# EAGLE board DMB-4771-Relais (EAGLE 6.5.0)
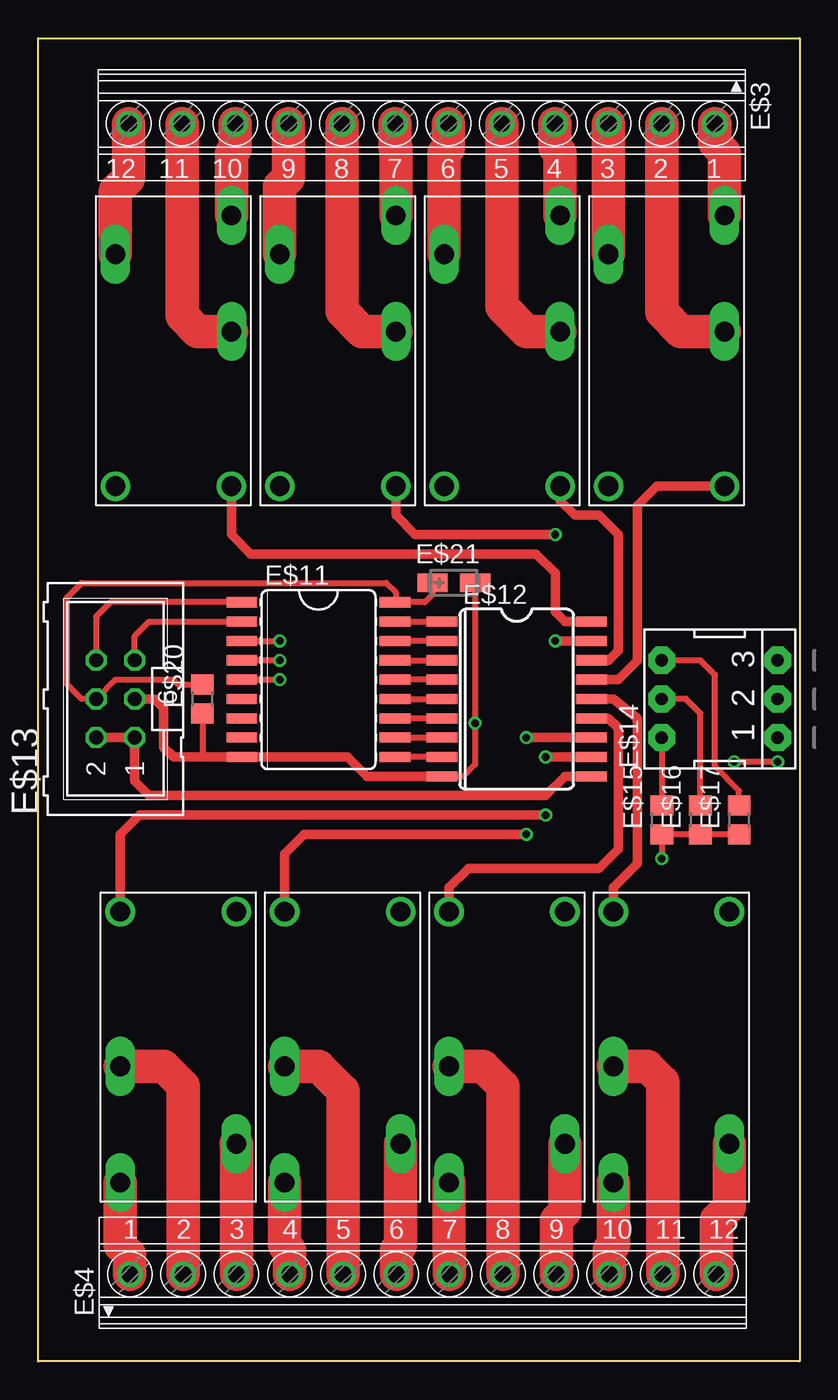
[diagram p0: board, top side]
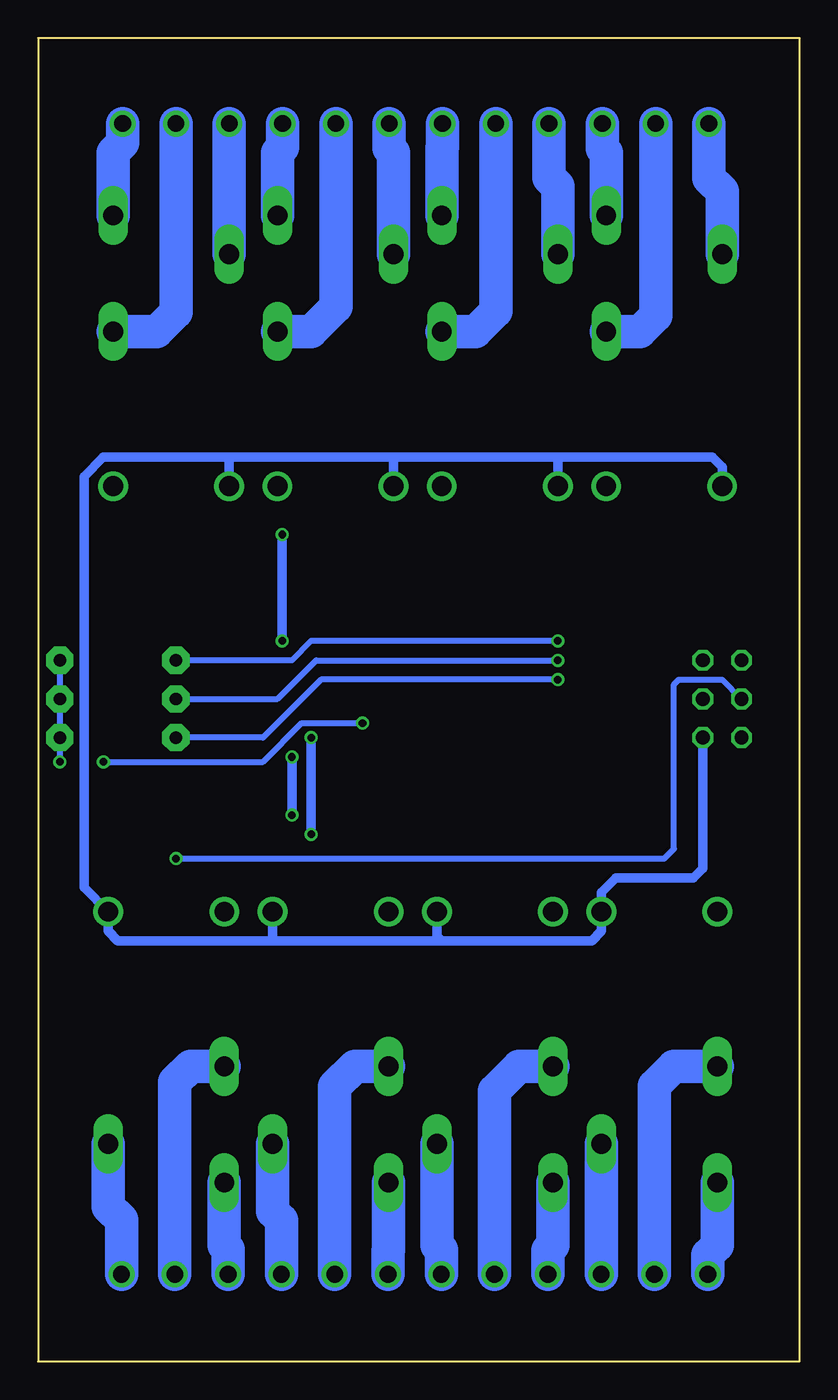
[diagram p1: board, bottom side, seen from below]

Size 50.01 x 86.89 mm. Coordinates in mm from the lower left corner, seen from the top.
Outline: 0,86.89 50.01,86.89 50.01,0 0,0 0,86.89
Copper layers (1*16): Top 0.0356mm / dielectric 1.5011mm / Bottom 0.0356mm
Design rules "LaenPCBOrder": minimum track width 6mil, minimum drill 13mil, track to track 6mil, track to pad 6mil, pad to pad 6mil, via to via 6mil, smd to smd 6mil, copper to edge 15mil, drill to drill 6mil, minimum pad ring 7mil, minimum via ring 7mil, stop-mask expansion 3mil, vias tented up to drill 0mil, thermal gap 10mil

## Footprints (pad centres in the part's own frame; a part is rotated, then mirrored left to right if it is on the bottom)
ALQ = drill 1.3: P$1 0,3.81; P$2 0,-3.81 | drill 1.3 pad 1.676 long: P$3 10.16,-3.81; P$4 17.78,-3.81; P$5 15.24,3.81
175317 = drill 1.1 pad 1.7: 1 -13.973,0; 2 -10.473,0; 3 -6.973,0; 4 -3.473,0; 5 0.028,0; 6 3.527,0; 7 7.027,0; 8 10.527,0; 9 14.027,0; 19 17.527,0; 20 21.027,0; 21 24.527,0
SO18W = smd 0.66 x 2.032: 1 -5.08,-5.029; 2 -3.81,-5.029; 3 -2.54,-5.029; 4 -1.27,-5.029; 5 0,-5.029; 6 1.27,-5.029; 7 2.54,-5.029; 8 3.81,-5.029; 9 5.08,-5.029; 10 5.08,5.029; 11 3.81,5.029; 12 2.54,5.029; 13 1.27,5.029; 14 0,5.029; 15 -1.27,5.029; 16 -2.54,5.029; 17 -3.81,5.029; 18 -5.08,5.029
SO18L = smd 0.66 x 2.032: 1 -0.635,-4.902; 2 0.635,-4.902; 3 1.905,-4.902; 4 3.175,-4.902; 5 4.445,-4.902; 6 5.715,-4.902; 7 6.985,-4.902; 8 8.255,-4.902; 9 9.525,-4.902; 10 9.525,4.902; 11 8.255,4.902; 12 6.985,4.902; 13 5.715,4.902; 14 4.445,4.902; 15 3.175,4.902; 16 1.905,4.902; 17 0.635,4.902; 18 -0.635,4.902
ML6 = drill 0.914 octagon: 1 -2.54,-1.27; 2 -2.54,1.27; 3 0,-1.27; 4 0,1.27; 5 2.54,-1.27; 6 2.54,1.27
EPG-03-SMALL = drill 0.813 pad 1.778 octagon: 1 -2.54,-3.81; 2 0,-3.81; 3 2.54,-3.81; 4 2.54,3.81; 5 0,3.81; 6 -2.54,3.81
R0805 = smd 1.3 x 1.5: 1 -0.95,0; 2 0.95,0
CT3216 = smd 2 x 1.2: + -1.4,0; - 1.4,0

## Placement (x,y rotation side)
E$1  ALQ105  [ALQ]  19.68,57.47 90 top
E$2  ALQ105  [ALQ]  8.89,57.47 90 top
E$3  [175317]  30.48,81.28 180 top
E$4  [175317]  20,5.71 0 top
E$5  ALQ105  [ALQ]  41.27,57.47 90 top
E$6  ALQ105  [ALQ]  30.48,57.47 90 top
E$7  ALQ105  [ALQ]  30.8,29.53 270 top
E$8  ALQ105  [ALQ]  41.59,29.53 270 top
E$9  ALQ105  [ALQ]  9.21,29.53 270 top
E$10  ALQ105  [ALQ]  20,29.53 270 top
E$11  MCP2308  [SO18W]  18.41,44.77 270 top
E$12  ULN2803  [SO18L]  31.43,47.94 270 top
E$13  [ML6]  5.08,43.5 90 top
E$14  [EPG-03-SMALL]  44.77,43.5 90 top
E$15  10K  [R0805]  40.96,35.56 90 top
E$16  10K  [R0805]  43.5,35.56 90 top
E$17  10K  [R0805]  46.04,35.56 90 top
E$20  100n  [R0805]  10.79,43.5 90 top
E$21  10u  [CT3216]  27.3,51.12 0 top

## Library data of the parts
E$1 E$2 E$5-E$10 = relay
E$3 E$4 = con-phoenix-350
E$11 = uln-udn
E$12 = SparkFun-PowerIC
E$13 = con-harting-ml
E$14 = special
E$15-E$17 E$20 E$21 = ref-packages

## Nets
3V3: E$11.18 E$13.4 E$15.1 E$16.1 E$17.1 E$20.2 E$21.+
5V: E$1.P$1 E$2.P$1 E$5.P$1 E$6.P$1 E$7.P$1 E$8.P$1 E$9.P$1 E$10.P$1 E$12.10 E$13.1 E$13.2
GND: E$11.9 E$12.9 E$13.3 E$14.1 E$14.2 E$14.3 E$20.1 E$21.-
S$8: E$2.P$5 E$3.21
S$9: E$2.P$3 E$3.20
S$10: E$2.P$4 E$3.19
S$11: E$1.P$5 E$3.9
S$13: E$1.P$4 E$3.7
S$14: E$1.P$3 E$3.8
S$15: E$3.6 E$6.P$5
S$16: E$3.5 E$6.P$3
S$17: E$3.4 E$6.P$4
S$18: E$3.3 E$5.P$5
S$19: E$3.2 E$5.P$3
S$20: E$3.1 E$5.P$4
S$21: E$4.21 E$8.P$5
S$22: E$4.20 E$8.P$3
S$23: E$4.19 E$8.P$4
S$24: E$4.8 E$7.P$3
S$25: E$4.6 E$10.P$5
S$26: E$4.5 E$10.P$3
S$27: E$4.3 E$9.P$5
S$28: E$4.2 E$9.P$3
S$29: E$4.9 E$7.P$5
S$30: E$4.7 E$7.P$4
S$31: E$4.4 E$10.P$4
S$32: E$4.1 E$9.P$4
S$61: E$11.17 E$12.1
S$62: E$11.16 E$12.2
S$63: E$11.15 E$12.3
S$64: E$11.14 E$12.4
S$65: E$11.13 E$12.5
S$66: E$11.12 E$12.6
S$67: E$11.11 E$12.7
S$68: E$11.10 E$12.8
S$70: E$2.P$2 E$12.18
S$71: E$1.P$2 E$12.17
S$72: E$6.P$2 E$12.16
S$73: E$5.P$2 E$12.15
S$74: E$8.P$2 E$12.14
S$75: E$7.P$2 E$12.13
S$76: E$10.P$2 E$12.12
S$77: E$9.P$2 E$12.11
S$78: E$11.3 E$14.4 E$17.2
S$79: E$11.4 E$14.5 E$16.2
S$80: E$11.5 E$14.6 E$15.2
SCL: E$11.1 E$13.6
SDA: E$11.2 E$13.5

## Tracks (layer width: path | path; a pad name or v marks a point on that pad's centre or on a via)
3V3  (via drill 0.5)
  Top 0.406: E$17.1 E$16.1 E$15.1 v40.96,33.02 | E$21.+ 25.91,50.35 25.4,49.85 E$11.18 23.5,50.02 23.5,50.48 22.86,51.12 2.86,51.12 1.91,50.16 1.91,44.45 2.86,43.5 E$13.4 5.08,44.77 8.89,44.77 9.21,44.45 E$20.2
  Bottom 0.406: v40.96,33.02 8.89,33.02 8.26,33.66 8.26,44.45 7.94,44.77 5.08,44.77 E$13.4
5V
  Top 0.61: E$13.2 E$13.1 6.35,38.1 7.3,37.15 33.34,37.15 34.61,38.42 E$12.10
  Bottom 0.61: 23.5,27.62 13.65,27.62 13.02,28.26 E$9.P$1 13.02,30.8 12.06,31.75 6.99,31.75 6.35,32.38 E$13.1 | 23.5,27.62 34.61,27.62 | 34.61,27.62 44.77,27.62 45.4,28.26 E$8.P$1 46.99,31.11 46.99,58.1 45.72,59.37 37.47,59.37 | E$7.P$1 34.61,27.62 | E$10.P$1 23.81,27.94 23.5,27.62 | E$2.P$1 5.08,58.74 5.71,59.37 15.88,59.37 | 15.88,59.37 26.67,59.37 | 26.67,59.37 37.47,59.37 | E$1.P$1 15.88,59.37 | E$6.P$1 26.67,59.37 | E$5.P$1 37.47,59.37
GND  (via drill 0.5)
  Top 0.406: 12.7,39.69 10.8,39.69 | 10.8,39.69 10.48,39.69 | E$21.- v28.7,41.91 28.7,39.18 27.94,38.42 E$12.9 | v48.58,39.37 v45.72,39.37 | E$20.1 10.79,39.69 10.8,39.69
  Top 0.61: E$13.3 7.62,43.5 8.26,42.86 8.26,40.32 8.89,39.69 10.48,39.69 E$11.9 | 15.56,39.69 E$11.9 | E$11.9 20.32,39.69 21.59,38.42 E$12.9
  Bottom 0.406: E$14.3 E$14.2 E$14.1 v48.58,39.37 | v45.72,39.37 35.24,39.37 32.7,41.91 v28.7,41.91
S$8
  Top 2.184: E$3.21 5.95,77.71 5.08,76.83 E$2.P$5
S$9
  Top 2.184: E$3.20 9.45,68.65 10.48,67.63 E$2.P$3
S$10
  Top 2.184: E$3.19 12.95,79.63 12.7,79.38 E$2.P$4
S$11
  Top 2.184: E$3.9 16.45,77.73 15.88,77.15 E$1.P$5
S$13
  Top 2.184: E$3.7 23.45,79.73 23.5,79.69 E$1.P$4
S$14
  Top 2.184: E$3.8 19.95,68.95 21.27,67.63 E$1.P$3
S$15
  Top 2.184: E$3.6 26.95,79.66 26.67,79.38 E$6.P$5
S$16
  Top 2.184: E$3.5 30.45,69.24 32.07,67.63 E$6.P$3
S$17
  Top 2.184: E$3.4 33.95,79.71 34.29,79.38 E$6.P$4
S$18
  Top 2.184: E$3.3 E$5.P$5
S$19
  Top 2.184: E$3.2 40.95,68.9 42.23,67.63 E$5.P$3
S$20
  Top 2.184: E$3.1 44.45,80.01 45.09,79.38 E$5.P$4
S$21
  Top 2.184: E$4.21 44.53,9.29 45.4,10.16 E$8.P$5
S$22
  Top 2.184: E$4.20 41.03,18.34 40.01,19.37 E$8.P$3
S$23
  Top 2.184: E$4.19 37.53,7.37 37.78,7.62 E$8.P$4
S$24
  Top 2.184: E$4.8 30.53,18.05 29.21,19.37 E$7.P$3
S$25
  Top 2.184: E$4.6 23.53,7.34 23.81,7.62 E$10.P$5
S$26
  Top 2.184: E$4.5 20.03,17.75 18.41,19.37 E$10.P$3
S$27
  Top 2.184: E$4.3 13.03,14.28 E$9.P$5
S$28
  Top 2.184: E$4.2 9.53,18.09 8.26,19.37 E$9.P$3
S$29
  Top 2.184: E$4.9 34.03,9.27 34.61,9.84 E$7.P$5
S$30
  Top 2.184: E$4.7 27.03,7.26 26.99,7.3 E$7.P$4
S$31
  Top 2.184: E$4.4 16.53,7.28 16.19,7.62 E$10.P$4
S$32
  Top 2.184: E$4.1 6.03,6.99 5.4,7.62 E$9.P$4
S$33
  Bottom 2.184: 5.95,81.28 5.95,77.71 5.08,76.83 5.08,72.71
S$34
  Bottom 2.184: 9.45,81.28 9.45,68.65 10.48,67.63 12.7,67.63
S$35
  Bottom 2.184: 12.95,81.28 12.95,79.63 12.7,79.38 12.7,75.25
S$36
  Bottom 2.184: 19.95,81.28 19.95,68.95 21.27,67.63 23.5,67.63
S$37
  Bottom 2.184: 26.95,81.28 26.95,79.66 26.67,79.38 26.67,72.71
S$38
  Bottom 2.184: 30.45,81.28 30.45,69.24 32.07,67.63 34.29,67.63
S$39
  Bottom 2.184: 37.45,81.28 37.45,72.72 37.47,72.71
S$40
  Bottom 2.184: 40.95,81.28 40.95,68.9 42.23,67.63 45.09,67.63
S$41
  Bottom 2.184: 16.45,81.28 16.45,77.73 15.88,77.15 15.88,72.71
S$42
  Bottom 2.184: 23.45,81.28 23.45,79.73 23.5,79.69 23.5,75.25
S$43
  Bottom 2.184: 33.95,81.28 33.95,79.71 34.29,79.38 34.29,75.25
S$44
  Bottom 2.184: 44.45,81.28 44.45,80.01 45.09,79.38 45.09,75.25
S$45
  Bottom 2.184: 44.53,5.71 44.53,9.29 45.4,10.16 45.4,14.29
S$46
  Bottom 2.184: 41.03,5.71 41.03,18.34 40.01,19.37 37.78,19.37
S$47
  Bottom 2.184: 37.53,5.71 37.53,7.37 37.78,7.62 37.78,11.75
S$48
  Bottom 2.184: 30.53,5.71 30.53,18.05 29.21,19.37 26.99,19.37
S$49
  Bottom 2.184: 23.53,5.71 23.53,7.34 23.81,7.62 23.81,14.29
S$50
  Bottom 2.184: 20.03,5.71 20.03,17.75 18.41,19.37 16.19,19.37
S$55
  Bottom 2.184: 13.03,5.71 13.03,14.28 13.02,14.29
S$56
  Bottom 2.184: 9.53,5.71 9.53,18.09 8.26,19.37 5.4,19.37
S$57
  Bottom 2.184: 34.03,5.71 34.03,9.27 34.61,9.84 34.61,14.29
S$58
  Bottom 2.184: 27.03,5.71 27.03,7.26 26.99,7.3 26.99,11.75
S$59
  Bottom 2.184: 16.53,5.71 16.53,7.28 16.19,7.62 16.19,11.75
S$60
  Bottom 2.184: 6.03,5.71 6.03,6.99 5.4,7.62 5.4,11.75
S$61
  Top 0.406: E$11.17 E$12.1
S$62
  Top 0.406: E$12.2 E$11.16
S$63
  Top 0.406: E$11.15 E$12.3
S$64
  Top 0.406: E$12.4 E$11.14
S$65
  Top 0.406: E$11.13 E$12.5
S$66
  Top 0.406: E$12.6 E$11.12
S$67
  Top 0.406: E$11.11 E$12.7
S$68
  Top 0.406: E$12.8 E$11.10
S$70
  Top 0.61: E$2.P$2 12.7,54.29 13.97,53.02 32.7,53.02 33.97,51.75 33.97,49.21 34.61,48.58 E$12.18
S$71  (via drill 0.5)
  Top 0.61: E$12.17 v33.97,47.31 | v33.97,54.29 24.77,54.29 23.5,55.56 E$1.P$2
  Bottom 0.61: v33.97,47.31 v33.97,54.29
S$72
  Top 0.61: E$6.P$2 34.29,56.52 35.24,55.56 36.83,55.56 38.1,54.29 38.1,46.67 37.47,46.04 E$12.16
S$73
  Top 0.61: E$12.15 38.1,44.77 39.37,46.04 39.37,56.2 40.64,57.47 E$5.P$2
S$74
  Top 0.61: E$12.14 37.78,43.5 39.37,42.23 39.37,32.7 37.78,31.11 E$8.P$2
S$75
  Top 0.61: E$12.13 37.47,42.23 38.1,41.59 38.1,33.66 36.83,32.38 28.26,32.38 26.99,31.11 E$7.P$2
S$76  (via drill 0.5)
  Top 0.61: E$10.P$2 16.19,33.34 17.46,34.61 v32.07,34.61 | v32.07,40.96 E$12.12
  Bottom 0.61: v32.07,34.61 v32.07,40.96
S$77  (via drill 0.5)
  Top 0.61: E$12.11 v33.34,39.69 | v33.34,35.88 6.67,35.88 5.4,34.61 E$9.P$2
  Bottom 0.61: v33.34,39.69 v33.34,35.88
S$78  (via drill 0.5)
  Top 0.406: E$11.3 v15.88,47.31 | E$17.2 46.04,37.47 44.45,39.05 44.45,45.09 43.5,46.04 E$14.4
  Bottom 0.406: v15.88,47.31 32.07,47.31 33.34,46.04 E$14.4
S$79  (via drill 0.5)
  Top 0.406: 15.24,46.04 E$11.4 v15.88,46.04 | E$16.2 43.5,42.55 42.55,43.5 E$14.5
  Bottom 0.406: E$14.5 34.29,43.5 31.75,46.04 v15.88,46.04
S$80  (via drill 0.5)
  Top 0.406: E$11.5 v15.88,44.77 | E$14.6 E$15.2
  Bottom 0.406: v15.88,44.77 31.43,44.77 35.24,40.96 E$14.6
SCL
  Top 0.406: E$11.1 4.76,49.85 3.81,48.9 E$13.6
SDA
  Top 0.406: E$13.5 6.35,47.62 7.3,48.58 E$11.2